# Altium PCB SmartBikeLight_Pcb.PcbDoc
Units mil, origin at the board's own origin, x right, y up, seen from the top; angles counter-clockwise.
Board outline 9040 x 330 mil, 2 copper layers (Top Layer, Bottom Layer); 55 components, 39 nets, 180 pads, 20 vias.
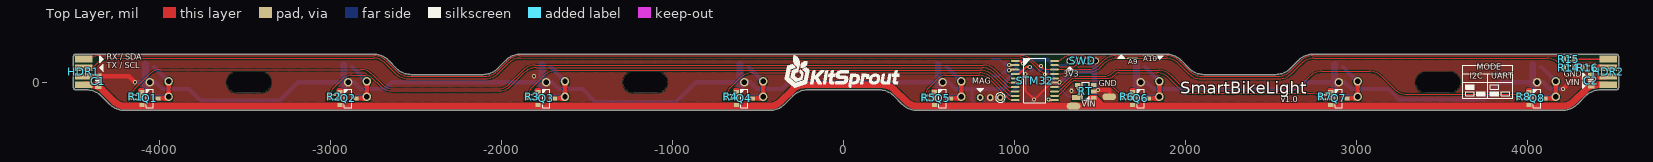
[diagram p0: Top Layer view]
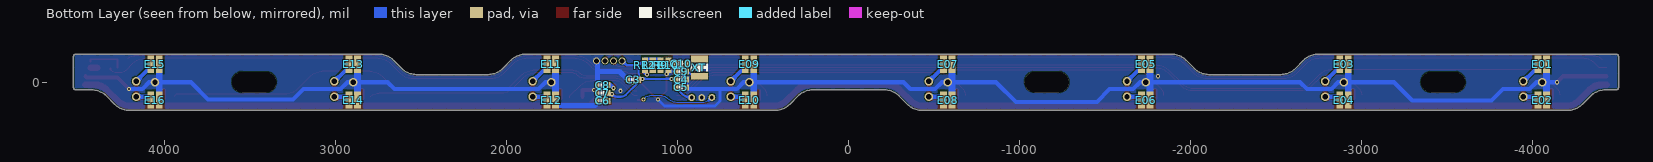
[diagram p1: Bottom Layer view, seen from below]
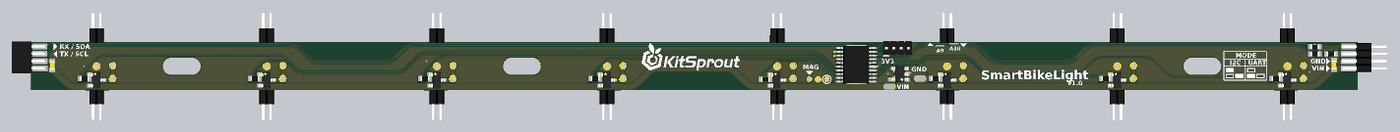
[diagram p2: 3D render of the assembled board from above, using the file's embedded part models]
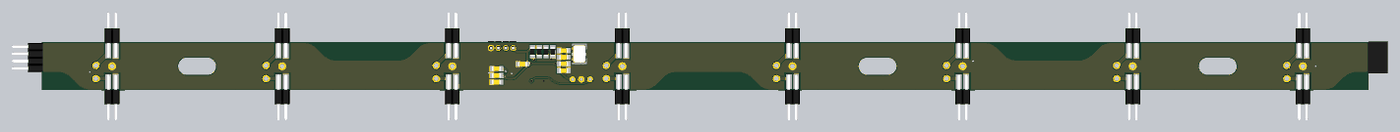
[diagram p3: 3D render of the assembled board from below, using the file's embedded part models]

## Layer stack, top to bottom
Top Solder: solder mask 0.4, Solder Resist, Dk 3.5
Top Layer: signal copper 1.4
Dielectric1: dielectric 12.6, FR-4, Dk 4.8
Bottom Layer: signal copper 1.4
Bottom Solder: solder mask 0.4, Solder Resist, Dk 3.5

## Board outline
-4427.8,-45 cw(c-4427.8,-165.71) -4342.44,-80.36 -4293.15,-129.64 ccw(c-4207.8,-44.29) -4207.8,-165 -430,-165 ccw(c-430,-44.29) -344.64,-129.64 -295.36,-80.36 cw(c-210,-165.71) -210,-45 210,-45 cw(c210,-165.71) 295.36,-80.36 344.64,-129.64 ccw(c430,-44.29) 430,-165 4207.8,-165 ccw(c4207.8,-44.29) 4293.15,-129.64 4342.44,-80.36 cw(c4427.8,-165.71) 4427.8,-45 4520,-45 ccw(c4520,-30) 4535,-30 4535,150 ccw(c4520,150) 4520,165 2748.9,165 ccw(c2748.9,44.29) 2663.54,129.64 2614.25,80.36 cw(c2528.9,165.71) 2528.9,45 2108.9,45 cw(c2108.9,165.71) 2023.54,80.36 1974.25,129.64 ccw(c1888.9,44.29) 1888.9,165 -1888.9,165 ccw(c-1888.9,44.29) -1974.25,129.64 -2023.54,80.36 cw(c-2108.9,165.71) -2108.9,45 -2528.9,45 cw(c-2528.9,165.71) -2614.25,80.36 -2663.54,129.64 ccw(c-2748.9,44.29) -2748.9,165 -4490,165 ccw(c-4490,150) -4505,150 -4505,-30 ccw(c-4490,-30) -4490,-45

## Design rules (kind name [scope] priority, off if disabled: settings)
Clearance ClearancePolygon [InPolygon] p1: gap=6
Clearance [All] p2: gap=6
ComponentClearance [All] p1: gap=0 collisioncheckmode=3 verticalgap=0 showdistances=FALSE
Height [All] p1: minheight=0 maxheight=5000 prefheight=500
HoleSize [All] p1: absolutevalues=TRUE maxlimit=200 minlimit=1 maxpercent=80.000 minpercent=20.000
HoleToHoleClearance [All] p1: gap=6 allowstackedmicrovias=TRUE
MinimumSolderMaskSliver [All] p1: minsoldermaskwidth=4
PlaneConnect [All] p1: planeconnectstyle=Direct reliefexpansion=20 reliefentries=4 reliefconductorwidth=20 reliefairgap=10
PolygonConnect [All] p1: connectstyle=Direct reliefconductorwidth=20 reliefentries=4 polygonreliefangle="90 Angle" airgapwidth=10
RoutingVias [All] p1: holewidth=12 width=20 viastyle="Through Hole" minholewidth=12 minwidth=20 maxholewidth=100 maxwidth=200
SilkToSilkClearance [All] p1: silktosilkclearance=0
SilkToSolderMaskClearance SilkscreenOverComponentPads [IsPad] p1: minsilkscreentomaskgap=1 clearancetoexposedcopper=TRUE
SolderMaskExpansion [All] p1: expansion=2
Width [All] p1: maxlimit=64 minlimit=6 preferedwidth=10
22 further rules are at their usual default settings.

## Components (designator, comment, footprint, x,y, rotation, side; value= is the part's Value field where it differs from the comment)
C1 "Cap_0603" CAP_0603 -4360,5 r270 top
C2 "Cap_0603" CAP_0603 4375,10 r270 top
C3 "Cap_0603" CAP_0603 1260,15 r180 bottom
C4 "Cap_0603" CAP_0603 980,16 r0 bottom
C5 "Cap_0603" CAP_0603 980,-30 r0 bottom
C6 "Cap_0603" CAP_0603 1437.92,-109.11 r180 bottom
C7 "Cap_0603" CAP_0603 1437.92,-63.11 r180 bottom
C8 "Cap_0603" CAP_0603 1437.92,-17.11 r180 bottom
C9 "Cap_0603" CAP_0603 980,62 r0 bottom
C10 "Cap_0603" CAP_0603 980,108 r0 bottom
E01 "HDR1x2_1.27T" HDR1X2_1.27_180H -4033.07,95 r90 bottom (schematic designator LED_EXT1)
E02 "HDR1x2_1.27" HDR1X2_1.27_180H -4083.07,-95 r270 bottom (schematic designator LED_EXT2)
E03 "HDR1x2_1.27T" HDR1X2_1.27_180H -2873.62,95 r90 bottom (schematic designator LED_EXT3)
E04 "HDR1x2_1.27" HDR1X2_1.27_180H -2923.62,-95 r270 bottom (schematic designator LED_EXT4)
E05 "HDR1x2_1.27T" HDR1X2_1.27_180H -1714.17,95 r90 bottom (schematic designator LED_EXT5)
E06 "HDR1x2_1.27" HDR1X2_1.27_180H -1764.17,-95 r270 bottom (schematic designator LED_EXT6)
E07 "HDR1x2_1.27T" HDR1X2_1.27_180H -554.72,95 r90 bottom (schematic designator LED_EXT7)
E08 "HDR1x2_1.27" HDR1X2_1.27_180H -604.72,-95 r270 bottom (schematic designator LED_EXT8)
E09 "HDR1x2_1.27T" HDR1X2_1.27_180H 604.72,95 r90 bottom (schematic designator LED_EXT9)
E10 "HDR1x2_1.27" HDR1X2_1.27_180H 554.72,-95 r270 bottom (schematic designator LED_EXT10)
E11 "HDR1x2_1.27T" HDR1X2_1.27_180H 1764.17,95 r90 bottom (schematic designator LED_EXT11)
E12 "HDR1x2_1.27" HDR1X2_1.27_180H 1714.17,-95 r270 bottom (schematic designator LED_EXT12)
E13 "HDR1x2_1.27T" HDR1X2_1.27_180H 2923.62,95 r90 bottom (schematic designator LED_EXT13)
E14 "HDR1x2_1.27" HDR1X2_1.27_180H 2873.62,-95 r270 bottom (schematic designator LED_EXT14)
E15 "HDR1x2_1.27T" HDR1X2_1.27_180H 4083.07,95 r90 bottom (schematic designator LED_EXT15)
E16 "HDR1x2_1.27" HDR1X2_1.27_180H 4033.07,-95 r270 bottom (schematic designator LED_EXT16)
HDR1 "HDR1x4_1.27" HDR1X4_1.27_180HF -4435,-15 r180 top
HDR2 "HDR1x4_1.27" HDR1X4_1.27_180H 4465,135 r0 top
Q1 "BJT_PNP" SOT23-3 -4058.07,-95 r0 top
Q2 "BJT_PNP" SOT23-3 -2898.62,-95 r0 top
Q3 "BJT_PNP" SOT23-3 -1739.17,-95 r0 top
Q4 "BJT_PNP" SOT23-3 -579.72,-95 r0 top
Q5 "BJT_PNP" SOT23-3 579.72,-95 r0 top
Q6 "BJT_PNP" SOT23-3 1738.89,-95 r0 top
Q7 "BJT_PNP" SOT23-3 2898.55,-95 r0 top
Q8 "BJT_PNP" SOT23-3 4058.07,-95 r0 top
R1 "Res_0603" RES_0603 -4140,-85 r0 top
R2 "Res_0603" RES_0603 -2980,-85 r0 top
R3 "Res_0603" RES_0603 -1820,-85 r0 top
R4 "Res_0603" RES_0603 -660,-85 r0 top
R5 "Res_0603" RES_0603 500,-90 r0 top
R6 "Res_0603" RES_0603 1660,-85 r0 top
R7 "Res_0603" RES_0603 2820,-85 r0 top
R8 "Res_0603" RES_0603 3980,-85 r0 top
R9 "Res_0603" RES_0603 1100,100 r270 bottom
R10 "Res_0603" RES_0603 1054,100 r270 bottom
R11 "Res_0603" RES_0603 1146,100 r270 bottom
R12 "Res_0603" RES_0603 1192,100 r270 bottom
R14 "Res_0603" RES_0603 4245,85 r0 top
R15 "Res_0603" RES_0603 4245,135 r0 top
R16 "Res_0603" RES_0603 4355,85 r0 top
RT "RT9193" SOT23-5 1417.92,-53.11 r180 top
STM32 "STM32F03xF" TSSOP_E170_P0.65_20 1120,10 r0 top
SWD "HDR1x4_1.27" HDR1X4_1.27_180 1325,125 r90 top
XT "XTAL_3225_2P" XT_3225_2 873,85 r270 bottom

## Footprints (in the part's own frame and the unit in brackets; to place one, negate y for a bottom-side part, rotate by r counter-clockwise, add the part's x,y. Pads: shape width x height; smd on the part's side, far side on the other; paste and mask are expansions set on the pad)
CAP_0603 [mil]
  rect 28x36 smd: 1(-32,0) 2(32,0)
  silkscreen extent -10,-16 10,16, body extent -31,-16 32,16, height 36
HDR1X2_1.27_180H [mil]
  rect 100x40 smd: 1(10,0) 2(10,-50)
  body extent -37,-75 275,25, height 49
HDR1X4_1.27_180 [mil]
  round 40 hole 30: 1(0,0) 2(0,-50) 3(0,-100) 4(0,-150)
  body extent -49,-175 49,25, height 210
HDR1X4_1.27_180H [mil]
  rect 100x40 smd: 1(10,0) 2(10,-50) 3(10,-100) 4(10,-150)
  body extent -37,-175 275,25, height 59
HDR1X4_1.27_180HF [mil]
  rect 100x40 smd: 1(10,0) 2(10,-50) 3(10,-100) 4(10,-150)
  body extent -28,-183 200,33, height 45
RES_0603 [mil]
  rect 28x36 smd: 1(-32,0) 2(32,0)
  silkscreen extent -10,-16 10,16, body extent -31,-16 32,16, height 20
SOT23-3 [mil]
  rect 30x24 smd: 1(-47,38) 2(-47,-38) 3(47,0)
  silkscreen extent -21,-53 21,53, body extent -55,-57 55,57, height 51
SOT23-5 [mil]
  rect 30x24 smd: 1(-47,38) 2(-47,0) 3(-47,-38) 4(47,-38) 5(47,38)
  silkscreen extent -21,-53 21,53, body extent -55,-57 55,57, height 57
TSSOP_E170_P0.65_20 [mil]
  oval 50x12 smd: 1(-115,115.16) 2(-115,89.57) 3(-115,63.98) 4(-115,38.39) 5(-115,12.8) 6(-115,-12.8) 7(-115,-38.39) 8(-115,-63.98) 9(-115,-89.57) 10(-115,-115.16) 11(115,-115.16) 12(115,-89.57) 13(115,-63.98) 14(115,-38.39) 15(115,-12.8) 16(115,12.8) 17(115,38.39) 18(115,63.98) 19(115,89.57) 20(115,115.16)
  silkscreen extent -65,-130 65,130, body extent -126,-130 126,130, height 42
XT_3225_2 [mil]
  rect 40x100 smd: 1(-50,0) 2(50,0)
  silkscreen extent -24,-49 24,49, body extent -63,-49 63,49, height 41

## Part data
C1 C2 C3 C4 C5 C6 C7 C8 C9 C10: "Capacitor"
E01 E02 E03 E04 E05 E06 E07 E08 E09 E10 E11 E12 E13 E14 E15 E16 HDR1 HDR2 SWD: "Header"
Q1 Q2 Q3 Q4 Q5 Q6 Q7 Q8: "Transistor"
R1 R2 R3 R4 R5 R6 R7 R8 R9 R10 R11 R12 R14 R15 R16: "Resistor"
RT: "Power"
STM32: "MCU"
XT: "Crystal Oscillator"

## Free pads (board coordinates)
  oval 258x118 hole 118 slot 258 at 0 deg mask-180: 0(-3478.35,0) 0(-1159.45,0) 0(3478.35,0)
  oval 80x40 smd: 0(1346,-140) 0(1555,-85)
  rect 50x30 smd: 0(1361,-89)
  round 50 hole 32: 1(-4058.36,0) 1(-3948.36,-85) 1(-3948.36,5) 1(-2898.62,0) 1(-2788.62,-85) 1(-2788.62,5) 1(-1739.17,0) 1(-1629.17,-85) 1(-1629.17,5) 1(-579.72,0) 1(-469.72,-85) 1(-469.72,5) 1(579.72,0) 1(689.72,-85) 1(689.72,5) 1(1738.89,0) 1(1848.89,-85) 1(1848.89,5) 1(2898.55,0) 1(3008.55,-85) 1(3008.55,5) 1(4058.07,0) 1(4168.07,-85) 1(4168.07,5)
  round 40 hole 22: 1(800,-89.18) 1(859.45,-90) 1(917.98,-90)
  oval 60x10 smd: 1(1690,140) 1(1785,155)

## Via types
v1: diameter 24, hole 12, Top Layer to Bottom Layer, 20 vias

## Nets (pads, with @x,y where several pads share a name; then routed paths per layer and width w, separated by ;. In a path a pad name is that pad's centre, name@x,y a point inside that pad or via, vN(x,y) a via of type N, cw(c..) or ccw(c..) an arc to the next point about the centre after c; other vN are vias at no path point)
3V3: C3.2 C4.2 C5.2 C7.2 pad.0@1361,-89 pad.1@917.98,-90 R9.1 R11.1 R12.1 RT.5 STM32.5 STM32.16 SWD.1 | length 969.7
  Top Layer w12: RT.5@1366.61,-95.42 RT.5
  Top Layer w24: RT.5@1370.92,-84.08 v1(1385,-70)
  Bottom Layer w12: pad.1@917.98,-90 ccw(c917.98,-7.86) 976.06,-65.94 C5.2 ; v1(1035,20) v1@1200,20 ; R12.1@1195.49,132 1228,99.49 ; SWD.1 1299.49,99.49 1228,99.49 ; v1@1390,-70 cw(c1353.79,-33.79) 1353.79,-85 1330.93,-85 cw(c1330.93,-46.53) 1303.73,-73.73 1237.19,-7.19 cw(c1259.39,15) C3.2 1228,99.49
  Bottom Layer w24: C5.2 C4.2 ; C4.2@1015,13 1022,20 v1(1035,20) ; R9.1 R12.1@1195.49,132 ; v1(1205,20) 1223,20 C3.2 ; v1(1385,-70) 1399.03,-70 C7.2
BOOT: R10.1 STM32.1 | length 74.9
  Top Layer w12: STM32.1 1034.84,125.16 v1(1050,110)
  Bottom Layer w24: v1(1050,110) 1050,128 R10.1
GND: C1.1 C2.1 C3.1 C4.1 C5.1 C6.1 C7.1 C8.1 C9.2 C10.2 E01.2 E02.1 E03.2 E04.1 E05.2 E06.1 E07.2 E08.1 E09.2 E10.1 E11.2 E12.1 E13.2 E14.1 E15.2 E16.1 HDR1.2 HDR2.3 pad.0@1555,-85 pad.1@579.72,0 pad.1@859.45,-90 pad.1@1738.89,0 pad.1@2898.55,0 pad.1@4058.07,0 pad.1@-579.72,0 pad.1@-1739.17,0 pad.1@-2898.62,0 pad.1@-4058.36,0 R10.2 RT.2 STM32.15 SWD.4 | length 12185.5
  Top Layer w12: v1(1064,48.39) 1064,-49 v1(1115,-100) ; v1@1116.47,-101.47 1215.14,-2.8 STM32.15 1262.2,-2.8 v1(1265,0)
  Top Layer w24: HDR1.2@-4435,35 -4180,35 v1(-4145,0) ; RT.2 1480.89,-53.11 v1(1489,-45) 1556.11,-45 pad.0@1556.11,-85 ; v1(4210,-40) 4278.39,28.39 4458.39,28.39 HDR2.3@4465,35
  Bottom Layer w16: 751.57,-40 751.57,-109.57 781,-139 1076,-139 v1(1115,-100)
  Bottom Layer w20: C5.1 948,7 C9.2@1009,68
  Bottom Layer w22: C9.2@1009,68 R10.2 ; C9.2@1012,60 C10.2 ; R10.2@1044.39,68 v1(1064,48.39)
  Bottom Layer w24: v1(-4145,0) -4024.09,0 -3984.09,-40 -3827.9,-40 -3760.7,-107.21 -3298.18,-107.21 -3190.97,0 -2864.35,0 -2824.35,-40 -2681.52,-40 -2641.52,0 -1704.9,0 -1664.9,-40 -1527.51,-40 -1452.51,-115 -978.8,-115 -863.8,0 -545.45,0 -505.45,-40 -360.87,-40 -320.87,0 614,0 654,-40 938,-40 C5.1 ; v1(1265,0) 1280,15 C3.1 ; 1710,0 1773.16,0 1813.16,-40 2656.37,-40 2696.37,0 2932.82,0 2972.82,-40 3190,-40 3250,-100 3748.4,-100 3848.4,0 4092.34,0 4132.34,-40 v1(4210,-40)
  Bottom Layer w30: C3.1 1339.88,62.88 1470,62.88 ; SWD.4@1469.92,125 1469.92,-122.53 1483.56,-136.17 E12.1@1704.03,-136.17
  Bottom Layer w40: E02.1@-4083.36,-105 E01.2@-4083.36,105 ; E04.1 E03.2 ; E06.1 E05.2 ; E08.1 E07.2 ; E10.1 E09.2 ; E12.1@1713.89,-105 E11.2@1713.89,105 ; E14.1@2873.55,-105 E13.2@2873.55,105 ; E16.1 E15.2
  other v1: 1335,-50 -1810,35
LED_1: R1.1 STM32.6 | length 5358.7
  Top Layer w6: R1.1@-4161,-75 cw(c-4105.47,-75) -4144.74,-35.74 -4064.6,44.4 cw(c-3993.89,-26.31) -3993.89,73.69 -2825.11,73.69 cw(c-2825.11,-26.31) -2754.4,44.4 -2700.15,-9.85 ccw(c-2629.44,60.87) -2629.44,-39.13 -2025.56,-39.13 ccw(c-2025.56,60.87) -1954.85,-9.85 -1874.29,70.71 cw(c-1803.58,0) -1803.58,100 818.58,100 cw(c818.58,0) 889.29,70.71 955,5 ccw(c973.82,23.82) 973.82,-2.8 STM32.6
LED_2: R2.1 STM32.7 | length 4182.7
  Top Layer w6: R2.1@-3002,-75 cw(c-2946.47,-75) -2985.74,-35.74 -2933.06,16.94 cw(c-2877.39,-38.72) -2877.39,40 -2794.29,40 cw(c-2794.29,-14.38) -2755.84,24.07 -2709.92,-21.85 ccw(c-2639.21,48.87) -2639.21,-51.13 -2017.56,-51.13 ccw(c-2017.56,48.87) -1946.85,-21.85 -1869.29,55.71 cw(c-1798.58,-15) -1798.58,85 812.08,85 cw(c812.08,-15) 882.79,55.71 958.5,-20 ccw(c978.75,0.25) 978.75,-28.39 STM32.7
LED_3: R3.1 STM32.8 | length 2959.6
  Top Layer w6: R3.1@-1842,-75 cw(c-1786.47,-75) -1825.74,-35.74 -1749.29,40.71 cw(c-1678.58,-30) -1678.58,70 804.45,70 cw(c804.45,-30) 875.16,40.71 960.87,-45 ccw(c982.55,-23.33) 982.55,-53.98 STM32.8
LED_4: R4.1 STM32.9 | length 1797.7
  Top Layer w6: R4.1@-682,-75 cw(c-626.47,-75) -665.74,-35.74 -604.29,25.71 cw(c-533.58,-45) -533.58,55 796.83,55 cw(c796.83,-45) 867.54,25.71 963.25,-70 ccw(c986.34,-46.9) 986.34,-79.57 STM32.9
LED_5: R5.1 STM32.10 | length 633.9
  Top Layer w6: R5.1@478,-80 cw(c545.6,-80) 497.8,-32.2 551.25,21.25 cw(c596.52,-24.02) 596.52,40 791.66,40 cw(c791.66,-60) 862.37,10.71 971.54,-98.46 ccw(c987.71,-82.29) 987.71,-105.16 STM32.10@996.59,-105.16
LED_6: R6.1 STM32.12 | length 473.3
  Top Layer w6: STM32.12 1245.24,-79.57 ccw(c1245.24,-54.95) 1262.64,-72.36 1334,-1 cw(c1360.56,-27.56) 1360.56,10 1493.88,10 cw(c1493.88,-101.33) 1572.61,-22.61 1630,-80 R6.1@1630,-91.4
LED_7: R7.1 STM32.13 | length 1647.3
  Top Layer w6: STM32.13 1248.05,-53.98 ccw(c1248.05,-22.66) 1270.2,-44.8 1323.62,8.62 cw(c1358.31,-26.06) 1358.31,22.99 1545.6,22.99 ccw(c1545.6,77.05) 1583.81,38.81 1590,45 cw(c1614.14,20.86) 1614.14,55 1833.47,55 cw(c1833.47,-45) 1904.18,25.71 1965.6,-35.71 ccw(c2036.31,35) 2036.31,-65 2749.72,-65 cw(c2749.72,-133.28) R7.1@2798,-85
LED_8: R8.1 STM32.14 | length 2877.4
  Top Layer w6: STM32.14 1247.68,-28.39 ccw(c1247.68,17.32) 1280,-15 1310.86,15.86 cw(c1357.07,-30.35) 1357.07,35 1526.72,35 ccw(c1526.72,103.28) 1575,55 cw(c1611.21,18.79) 1611.21,70 1843.92,70 cw(c1843.92,-30) 1914.64,40.71 1976.06,-20.71 ccw(c2046.77,50) 2046.77,-50 2604.79,-50 ; 2603.58,-50 ccw(c2603.58,50) 2674.29,-20.71 2729.09,34.09 cw(c2799.8,-36.62) 2799.8,63.38 3079.49,63.38 cw(c3079.49,-36.62) 3150.2,34.09 3225,-40.71 ccw(c3295.71,30) 3295.71,-70 3933,-70 R8.1
MAG: pad.1@800,-89.18 STM32.11 | length 465.4
  Top Layer w12: v1(1200,-99.95) 1205.21,-105.16 STM32.11
  Bottom Layer w6: pad.1@800,-89.18 813.72,-102.9 ccw(c855,-61.62) 855,-120 994.3,-120 ccw(c994.3,-20.01) 1065,-90.71 cw(c1093.28,-119) 1093.28,-79 1163.56,-79 cw(c1163.56,-116.38) 1190,-89.95 v1(1200,-99.95)
NetC8_2: C8.2 RT.4 | length 59.9
  Top Layer w24: RT.4 1375,-19.19 v1(1375,-35)
  Bottom Layer w24: v1(1375,-35) 1392.89,-17.11 C8.2
NetD1_1: E01.1 E02.2 pad.1@-3948.36,5 pad.1@-3948.36,-85 Q1.3 | length 361.5
  Top Layer w24: Q1.3@-4011.36,-95 -3958.36,-95 -3948.36,-85 pad.1@-3948.36,5
  Bottom Layer w24: E01.1@-4033.36,90 pad.1@-3948.36,5 ; E02.2@-4032.55,-85 pad.1@-3948.36,-85
NetD3_1: E03.1 E04.2 pad.1@-2788.62,5 pad.1@-2788.62,-85 Q2.3 | length 361.5
  Top Layer w24: Q2.3 -2798.62,-95 -2788.62,-85 pad.1@-2788.62,5
  Bottom Layer w24: E03.1@-2873.62,90 pad.1@-2788.62,5 ; E04.2@-2872.81,-85 pad.1@-2788.62,-85
NetD5_1: E05.1 E06.2 pad.1@-1629.17,5 pad.1@-1629.17,-85 Q3.3 | length 361.5
  Top Layer w24: Q3.3 -1639.17,-95 -1629.17,-85 pad.1@-1629.17,5
  Bottom Layer w24: E05.1@-1714.17,90 pad.1@-1629.17,5 ; E06.2@-1713.36,-85 pad.1@-1629.17,-85
NetD7_1: E07.1 E08.2 pad.1@-469.72,5 pad.1@-469.72,-85 Q4.3 | length 361.5
  Top Layer w24: Q4.3 -479.72,-95 -469.72,-85 pad.1@-469.72,5
  Bottom Layer w24: E07.1@-554.72,90 pad.1@-469.72,5 ; E08.2@-553.91,-85 pad.1@-469.72,-85
NetD9_1: E09.1 E10.2 pad.1@689.72,5 pad.1@689.72,-85 Q5.3 | length 361.5
  Top Layer w24: Q5.3 679.72,-95 689.72,-85 pad.1@689.72,5
  Bottom Layer w24: E09.1@604.72,90 pad.1@689.72,5 ; E10.2@605.53,-85 pad.1@689.72,-85
NetD11_1: E11.1 E12.2 pad.1@1848.89,5 pad.1@1848.89,-85 Q6.3 | length 361.5
  Top Layer w24: Q6.3 1838.89,-95 1848.89,-85 pad.1@1848.89,5
  Bottom Layer w24: E11.1@1763.89,90 pad.1@1848.89,5 ; E12.2@1764.7,-85 pad.1@1848.89,-85
NetD13_1: E13.1 E14.2 pad.1@3008.55,5 pad.1@3008.55,-85 Q7.3 | length 361.5
  Top Layer w24: Q7.3 2998.55,-95 3008.55,-85 pad.1@3008.55,5
  Bottom Layer w24: E13.1@2923.55,90 pad.1@3008.55,5 ; E14.2@2924.36,-85 pad.1@3008.55,-85
NetD15_1: E15.1 E16.2 pad.1@4168.07,5 pad.1@4168.07,-85 Q8.3 | length 362.7
  Top Layer w24: Q8.3 4158.07,-95 4168.07,-85 pad.1@4168.07,5
  Bottom Layer w24: E16.2@4083.07,-85.81 4083.88,-85 pad.1@4168.07,-85 ; E15.1@4083.07,90 pad.1@4168.07,5
NetQ1_1: Q1.1 R1.2
NetQ2_1: Q2.1 R2.2
NetQ3_1: Q3.1 R3.2
NetQ4_1: Q4.1 R4.2
NetQ5_1: Q5.1 R5.2
NetQ6_1: Q6.1 R6.2
NetQ7_1: Q7.1 R7.2
NetQ8_1: Q8.1 R8.2
RSCL/TX: HDR2.2 R16.2 | length 40
  Top Layer w36: R16.2@4395,85 HDR2.2@4435,85
RSDA/RX: HDR2.1 R14.2 R15.2 | length 223
  Top Layer w10: R14.2 R15.2 4435,135 HDR2.1@4435,120
RST: R9.2 STM32.4 | length 128.4
  Top Layer w12: STM32.4 1027.39,48.39 1069,90 v1(1090,90)
  Bottom Layer w24: v1(1090,90) 1100,80 R9.2
SCL/TX: HDR1.3 pad.1@1690,140 R12.2 R14.1 R16.1 STM32.17 | length 9065.1
  Top Layer w6: HDR1.3@-4435.7,85 -4391.08,85 -4359.18,116.9 cw(c-4301,58.72) -4301,141 -2751.42,141 cw(c-2751.42,41) -2680.71,111.71 -2619.29,50.29 ccw(c-2548.58,121) -2548.58,21 -2092.89,21 ccw(c-2092.89,120.96) -2022.18,50.25 -1960.71,111.71 cw(c-1890,41) -1890,141 ; -1890,141.12 1036.68,142.08 ; 1036.68,141.95 cw(c1036.68,54.9) 1098.23,116.45 1137.01,77.68 ccw(c1207.72,148.39) 1207.72,48.39 STM32.17 1275.03,48.39 ccw(c1275.03,70.97) 1291,55 cw(c1304,42) 1304,60.39 1435.69,60.39 ccw(c1435.69,160.39) 1506.4,89.68 1527.44,110.71 cw(c1598.15,40) 1598.15,140 1888.58,140 cw(c1888.58,40) 1959.29,110.71 ; 1960.06,109.94 2020.71,49.29 ccw(c2091.42,120) 2091.42,20 2548.58,20 ccw(c2548.58,120) 2619.29,49.29 2680.71,110.71 cw(c2751.42,40) 2751.42,140 4116.58,140 cw(c4116.58,40) 4187.29,110.71 R14.1@4210.37,87.63 ; R14.1 4227.44,70.56 ccw(c4265,108.11) 4265,55 4283.74,55 ; 4278.74,55 ccw(c4278.74,108.11) R16.1@4316.3,70.56
  Top Layer w10: R16.1@4318,73 R16.1@4318,81.27
  Bottom Layer w24: v1(1180,44.42) 1192,56.42 R12.2@1192,68.95
SDA/RX: HDR1.4 pad.1@1785,155 R11.2 R15.1 STM32.18 | length 8884.2
  Top Layer w6: HDR1.4@-4411.74,132.73 cw(c-4357.98,78.97) -4357.98,155 ; -4357.5,155 -2746.42,155 cw(c-2746.42,55) -2675.71,125.71 -2614.29,64.29 ccw(c-2543.58,135) -2543.58,35 -2096.42,35 ccw(c-2096.42,135) -2025.71,64.29 -1964.29,125.71 cw(c-1893.58,55) -1893.58,155 1036.67,155.96 cw(c1036.67,55.96) 1107.38,126.67 1129.83,104.23 ccw(c1200.54,174.94) 1200.54,74.94 ; 1200.54,75 1428.71,75 ; 1428.58,75 ccw(c1428.58,175) 1499.29,104.29 1520.71,125.71 cw(c1591.42,55) 1591.42,155 1892.25,155 ; 1893.58,155 cw(c1893.58,55) 1964.29,125.71 ; 1965.1,124.9 2025.71,64.29 ccw(c2096.42,135) 2096.42,35 2543.58,35 ccw(c2543.58,135) 2614.29,64.29 2675.71,125.71 cw(c2746.42,55) 2746.42,155 4180,155 ; 4176.94,155 cw(c4176.94,99.33) R15.1@4216.3,138.7
  Bottom Layer w24: R11.2 1155,77 v1(1155,96)
SWCLK: STM32.20 SWD.3 | length 202.7
  Top Layer w6: STM32.20 STM32.20@1240.19,125.16 ; STM32.20@1253.44,122.12 ccw(c1241.5,172.87) 1278.37,136 cw(c1324.24,90.13) 1324.24,155 1394.27,155 cw(c1394.27,124.27) 1416,146 1416.51,145.49 cw(c1396.03,125) SWD.3
SWDIO: STM32.19 SWD.2 | length 136.9
  Top Layer w6: STM32.19@1253.83,101.17 ccw(c1280.79,128.13) 1280.79,90 1337.64,90 ccw(c1337.64,122.25) 1360.45,99.45 SWD.2@1378,117
VIN: C1.2 C2.2 C6.2 HDR1.1 HDR2.4 pad.0@1346,-140 Q1.2 Q2.2 Q3.2 Q4.2 Q5.2 Q6.2 Q7.2 Q8.2 RT.1 RT.3 | length 9211.6
  Top Layer w12: v1@1437.92,-107.08 1437.92,-36.14 1458.95,-15.11 RT.3
  Top Layer w40: HDR1.1@-4435,-15 -4406.42,-15 cw(c-4406.42,-115) -4335.71,-44.29 -4270.51,-109.49 ; -4269.29,-110.71 ccw(c-4198.58,-40) -4198.58,-140 -436.42,-140 ccw(c-436.42,-40) -365.71,-110.71 -299.29,-44.29 cw(c-228.58,-115) -228.58,-15 228.58,-15 cw(c228.58,-115) 299.29,-44.29 365.54,-110.54 ccw(c436.25,-39.83) 436.25,-139.83 4203.75,-139.83 ccw(c4203.75,-39.83) 4274.46,-110.54 4340.71,-44.29 cw(c4411.42,-115) 4411.42,-15 HDR2.4@4465,-15
  Bottom Layer w24: C6.2@1405.92,-113.11 1418.03,-101 v1(1435,-101)
XIN: C10.1 STM32.2 XT.1 | length 150.5
  Top Layer w12: v1@970,96 v1@970.43,95.57 ; v1@970.43,99.57 STM32.2
  Bottom Layer w12: XT.1@870,135 910.98,135 937.98,108 C10.1
  Bottom Layer w24: C10.1@948,110 958,100 v1(970,100)
XOUT: C9.1 STM32.3 XT.2 | length 152
  Top Layer w12: v1(970,70) 973.98,73.98 STM32.3
  Bottom Layer w12: XT.2@870,35 911.24,35 938.24,62 C9.1
  Bottom Layer w24: C9.1@948,60 958,70 v1(970,70)

## Polygon pours and split planes (outlines as drawn)
GND on Top Layer "Bottom Layer-No Net" (hatched 45Degree grid 4 track 6, remove dead copper, pour order 9): 4535,150 ccw(c4520,150) 4520,165 2748.9,165 2740.32,165 ccw(c2740.31,65.01) 2669.61,135.71 2645,111.1 2608.19,74.29 cw(c2537.48,144.99) 2537.48,45 2465,45 2100.32,45 cw(c2100.32,145) 2029.61,74.29 2000,103.9 1968.19,135.71 ccw(c1897.48,65.01) 1897.48,165 1755,165 -1897.48,165 ccw(c-1897.48,65.01) -1968.19,135.71 -1995,108.9 -2029.61,74.29 cw(c-2100.32,144.99) -2100.32,45 -2320,45 -2537.48,45 cw(c-2537.48,145) -2608.19,74.29 -2633.9,100 -2669.61,135.71 ccw(c-2740.31,65.01) -2740.32,165 -3045,165 -4490,165 ccw(c-4490,150) -4505,150 -4505,-30 ccw(c-4490,-30) -4490,-45 -4435,-45 -4419.22,-45 cw(c-4419.21,-144.99) -4348.51,-74.29 -4315,-107.8 -4292.08,-130.71 ccw(c-4212.15,-54.81) -4215,-165 -420,-165 ccw(c-424.08,-58.54) -345.71,-130.71 -305,-90 -289.29,-74.29 cw(c-218.58,-144.99) -218.58,-45 -170,-45 218.58,-45 cw(c218.59,-144.98) 289.29,-74.29 325,-110 350.71,-135.71 ccw(c421.42,-65) 421.42,-165 4170,-165 4216.37,-165 ccw(c4216.37,-65) 4287.08,-135.71 4315,-107.8 4348.51,-74.29 cw(c4419.21,-144.99) 4419.22,-45 4480,-45 4520,-45 ccw(c4520,-30) 4535,-30
GND on Bottom Layer "Bottom Layer-No Net" (hatched 45Degree grid 4 track 6, remove dead copper, pour order 10): 4535,150 ccw(c4520,150) 4520,165 2748.9,165 2740.32,165 ccw(c2740.31,65.01) 2669.61,135.71 2645,111.1 2608.19,74.29 cw(c2537.48,144.99) 2537.48,45 2465,45 2100.32,45 cw(c2100.32,145) 2029.61,74.29 2000,103.9 1968.19,135.71 ccw(c1897.48,65.01) 1897.48,165 1755,165 -1897.48,165 ccw(c-1897.48,65.01) -1968.19,135.71 -1995,108.9 -2029.61,74.29 cw(c-2100.32,144.99) -2100.32,45 -2320,45 -2537.48,45 cw(c-2537.48,145) -2608.19,74.29 -2633.9,100 -2669.61,135.71 ccw(c-2740.31,65.01) -2740.32,165 -3045,165 -4490,165 ccw(c-4490,150) -4505,150 -4505,-30 ccw(c-4490,-30) -4490,-45 -4435,-45 -4419.22,-45 cw(c-4419.21,-144.99) -4348.51,-74.29 -4315,-107.8 -4292.08,-130.71 ccw(c-4212.15,-54.81) -4215,-165 -420,-165 ccw(c-424.08,-58.54) -345.71,-130.71 -305,-90 -289.29,-74.29 cw(c-218.58,-144.99) -218.58,-45 -170,-45 218.58,-45 cw(c218.59,-144.98) 289.29,-74.29 325,-110 350.71,-135.71 ccw(c421.42,-65) 421.42,-165 4170,-165 4216.37,-165 ccw(c4216.37,-65) 4287.08,-135.71 4315,-107.8 4348.51,-74.29 cw(c4419.21,-144.99) 4419.22,-45 4480,-45 4520,-45 ccw(c4520,-30) 4535,-30

## Other copper
Top Layer:
  pour cut-out: 4540,-45 4405,-45 4405,165 4540,165
  pour cut-out: -4510,165 -4375,165 -4375,-45 -4510,-45
  region net VIN: 1394,-125 1444,-75 1480,-75 1530,-125
  region net NetQ6_1: 1680.08,-35 1675.08,-40 1675,-100 1680,-105 1705,-105 1710,-100 1710,-40 1705,-35
  region net NetQ7_1: 2840.08,-35 2835.08,-40 2835,-100 2840,-105 2865,-105 2870,-100 2870,-40 2865,-35
  region net NetQ8_1: 4000.08,-35 3995.08,-40 3995,-100 4000,-105 4025,-105 4030,-100 4030,-40 4025,-35
  region net NetQ4_1: -639.92,-35 -644.92,-40 -645,-100 -640,-105 -615,-105 -610,-100 -610,-40 -615,-35
  region net NetQ3_1: -1799.92,-35 -1804.92,-40 -1805,-100 -1800,-105 -1775,-105 -1770,-100 -1770,-40 -1775,-35
  region net NetQ2_1: -2959.92,-35 -2964.92,-40 -2965,-100 -2960,-105 -2935,-105 -2930,-100 -2930,-40 -2935,-35
  region net NetQ1_1: -4119.92,-35 -4124.92,-40 -4125,-100 -4120,-105 -4095,-105 -4090,-100 -4090,-40 -4095,-35
  region net NetQ5_1: 520.08,-40 515.08,-45 515,-105 520,-110 545,-110 550,-105 550,-45 545,-40
Bottom Layer:
  pour cut-out: -4118.07,170 -3998.07,170 -3998.07,40 -4118.07,40
  pour cut-out: -4118.07,-40 -3998.07,-40 -3998.07,-170 -4118.07,-170
  pour cut-out: -2958.33,-40 -2838.33,-40 -2838.33,-170 -2958.33,-170
  pour cut-out: -2958.33,170 -2838.33,170 -2838.33,40 -2958.33,40
  pour cut-out: -1798.89,-40 -1678.89,-40 -1678.89,-170 -1798.89,-170
  pour cut-out: -1798.89,170 -1678.89,170 -1678.89,40 -1798.89,40
  pour cut-out: -639.44,-40 -519.44,-40 -519.44,-170 -639.44,-170
  pour cut-out: -639.44,170 -519.44,170 -519.44,40 -639.44,40
  pour cut-out: 520.01,-40 640.01,-40 640.01,-170 520.01,-170
  pour cut-out: 520.01,170 640.01,170 640.01,40 520.01,40
  pour cut-out: 1679.17,-40 1799.17,-40 1799.17,-170 1679.17,-170
  pour cut-out: 1679.17,170 1799.17,170 1799.17,40 1679.17,40
  pour cut-out: 2838.84,-40 2958.84,-40 2958.84,-170 2838.84,-170
  pour cut-out: 2838.84,170 2958.84,170 2958.84,40 2838.84,40
  pour cut-out: 3998.36,-40 4118.36,-40 4118.36,-170 3998.36,-170
  pour cut-out: 3998.36,170 4118.36,170 4118.36,40 3998.36,40

## Silkscreen, mask and mechanical layers (free items; w line width, h text height)
Top Overlay:
  drawing of 3595 lines, arcs and shapes, not listed
  text "RX / SDA" at -4310,120 h60
  text "A10" at 1755,110 h50
  text "A9" at 1665,95 h50
  text "TX / SCL" at -4310,70 h60
  text "MODE" at 3705,60 h60
  text "3V3" at 1287,20 h60
  text "GND" at 4215,20 h60
  text "I2C" at 3665,10 h60
  text "UART" at 3790,10 h60
  text "MAG" at 755,-20 h60
  text "VIN" at 4225,-30 h60
  text "GND" at 1495,-35 h60
  text "SmartBikeLight" at 1970,-90 h120
  text "v1.0" at 2560,-130 h60
  text "VIN" at 1395,-155 h60
Mechanical 1:
  the board outline again, w2
Mechanical 4:
  lines w5: -4637.8,0 0,0 ; -4058.07,-800 -4058.07,800 ; -3478.35,-800 -3478.35,800 ; -2898.62,-800 -2898.62,800 ; -2318.9,-800 -2318.9,800 ; -1739.17,-800 -1739.17,800 ; -1159.45,-800 -1159.45,800 ; -579.72,-800 -579.72,800 ; 0,-670 0,0 ; 0,670 0,0 ; 579.72,-800 579.72,800 ; 1159.45,-800 1159.45,800 ; 1739.17,-800 1739.17,800 ; 2318.9,-800 2318.9,800 ; 2898.62,-800 2898.62,800 ; 3478.35,-800 3478.35,800 ; 4058.07,-800 4058.07,800 ; 4535,0 0,0 ; -4505,-165 10,-165 4535,-165 4535,165 10,165 -4505,165 -4505,-165 ; -45,-45 45,-45 45,45 -45,45 -45,-45
Mechanical 13:
  circle w5: c3478.35,0 r130.98
  circle w5: c-1159.45,0 r130.98
  circle w5: c-3478.35,0 r130.98
  lines w2: -4505,-165 -4505,165 4535,165 4535,-165 -4505,-165
Drill Drawing:
  lines w118: -3548.35,-0.43 -3408.35,-0.43 ; -1229.45,-0.43 -1089.45,-0.43 ; 3408.35,-0.43 3548.35,-0.43

## Dimensions
4535,165 to -4505,165 on Mechanical 13
4535,-165 to 4535,165 on Mechanical 13

## Panel: embedded boards
"SmartBikeLight_Pcb.PcbDoc" at 4505,-949.96, 1 rows x 1 columns, spacing 0 x 0, rotation 0
"SmartBikeLight_Pcb.PcbDoc" at -4507,-549.96, 1 rows x 1 columns, spacing 0 x 0, rotation 0